# Altium PCB PCB1.PcbDoc
Units mil, origin at the board's own origin, x right, y up, seen from the top; angles counter-clockwise.
Board outline 6000 x 4000 mil, 2 copper layers (Top Layer, Bottom Layer); 264 components, 215 nets, 952 pads, 44 vias.
Unrouted connection lines stored in the file: 660.
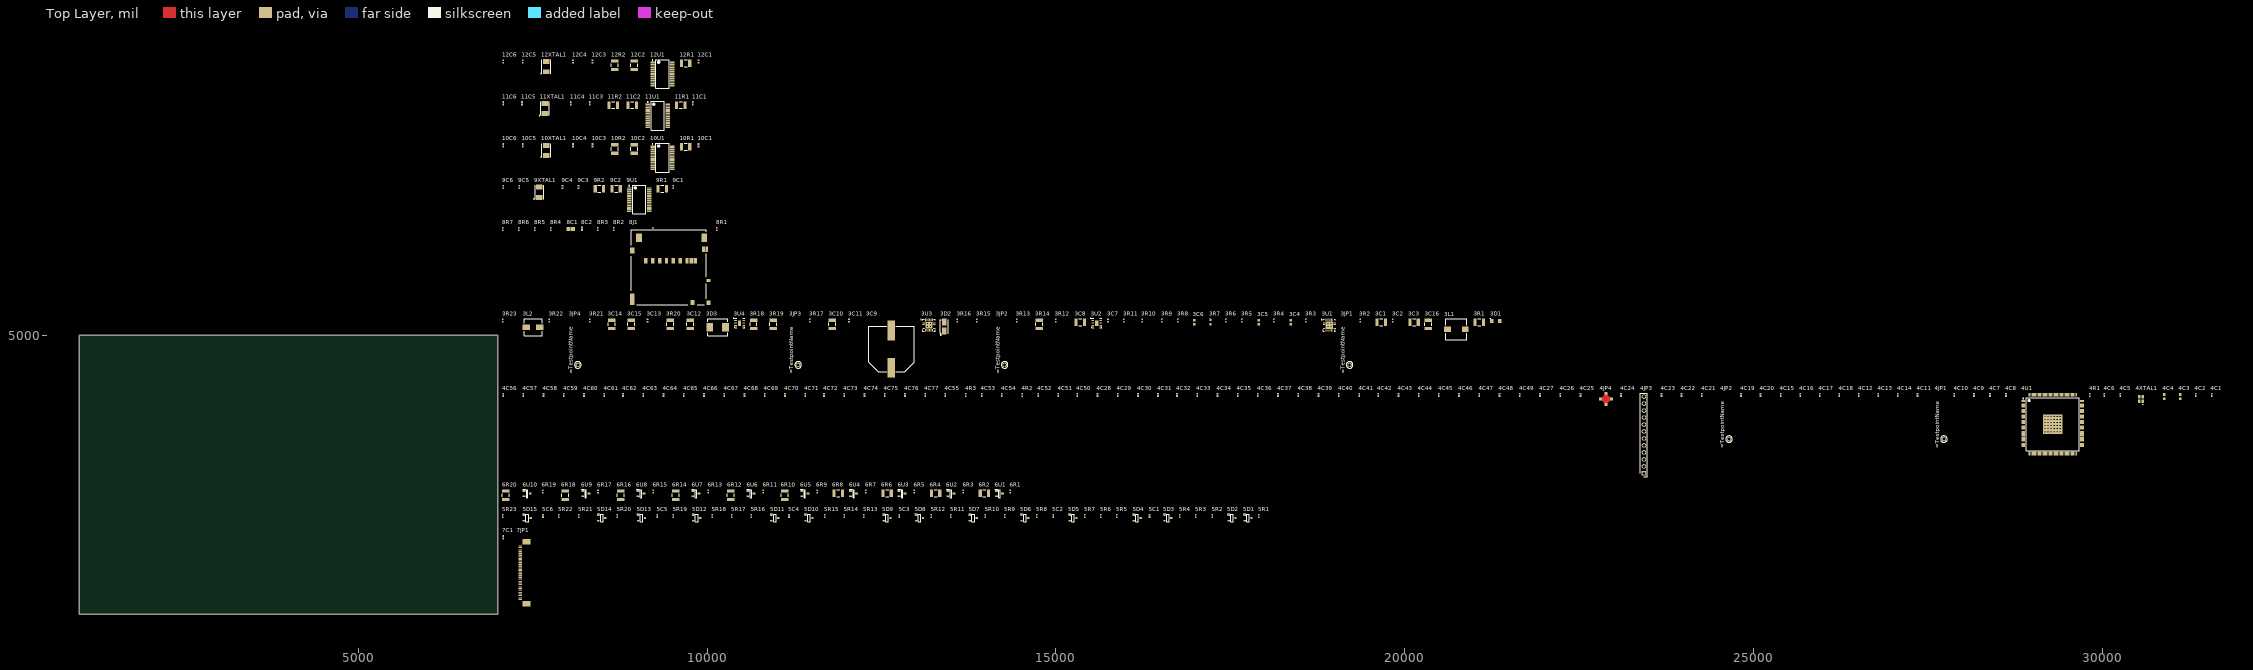
[diagram p0: Top Layer view]
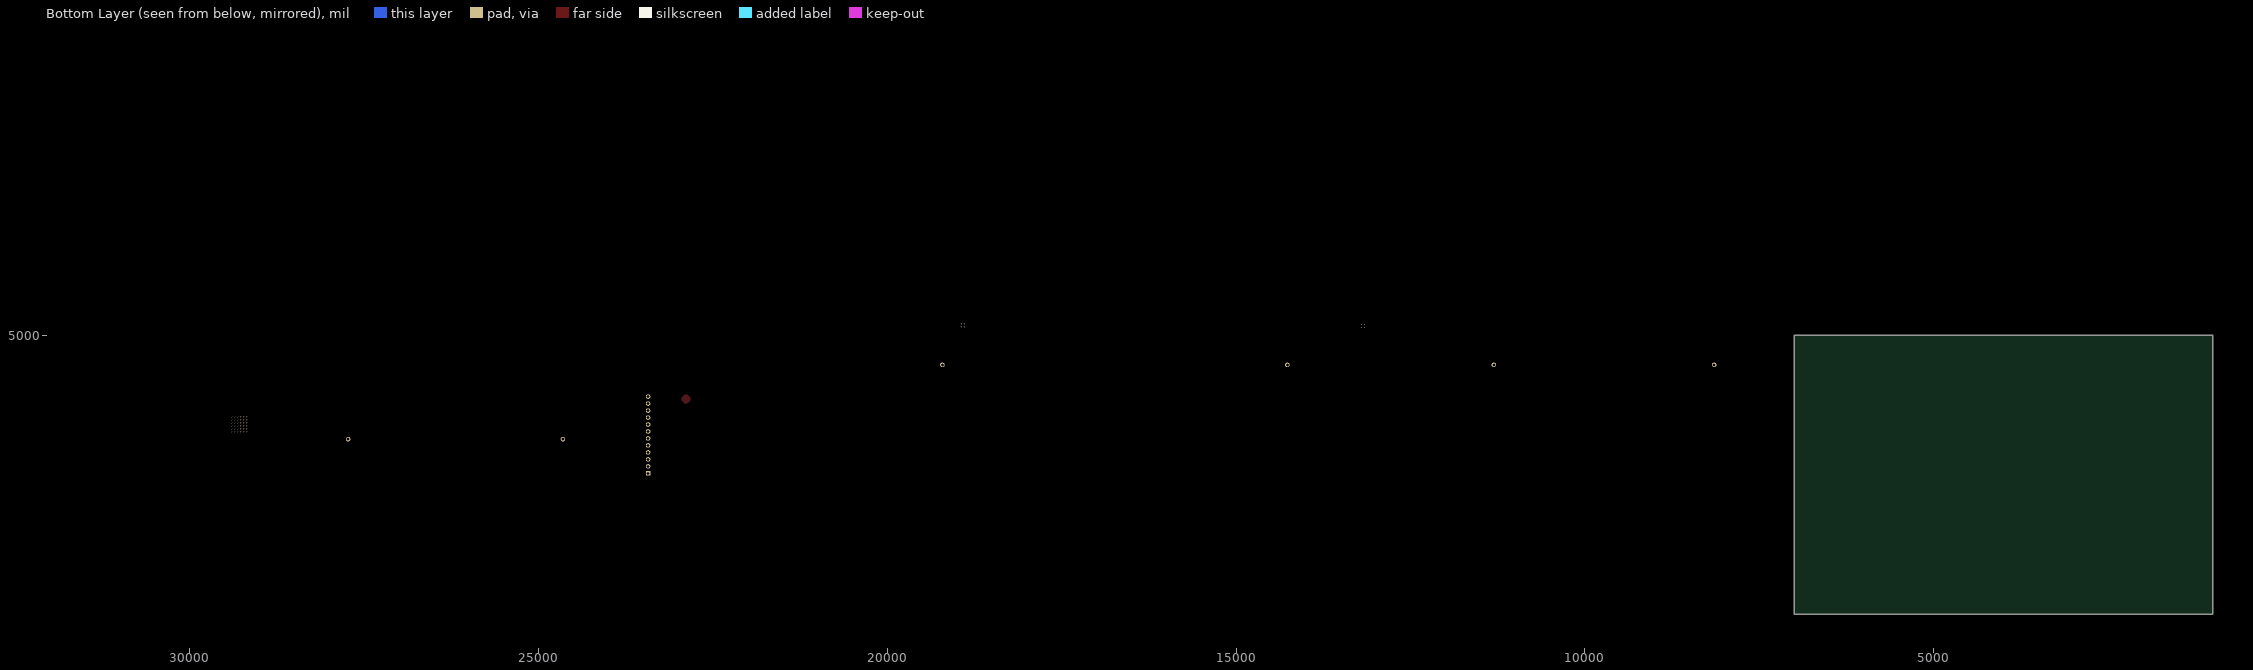
[diagram p1: Bottom Layer view, seen from below]

## Layer stack, top to bottom
Top Solder: solder mask 0.4, Solder Resist, Dk 3.5
Top Layer: signal copper 1.4
Dielectric 1: dielectric 12.6, FR-4, Dk 4.8
Bottom Layer: signal copper 1.4
Bottom Solder: solder mask 0.4, Solder Resist, Dk 3.5

## Board outline
1000,1000 7000,1000 7000,5000 1000,5000

## Design rules (kind name [scope] priority, off if disabled: settings)
Clearance [All] p1: gap=10 ignorepadtopadclearanceinfootprint=FALSE except(0: Arc-Hole Track-Hole SMDPad-Hole THPad-Hole Via-Hole Fill-Hole Poly-Hole Region-Hole Text-Hole)
PolygonConnect [All] p1: connectstyle=Relief reliefconductorwidth=10 reliefentries=4 polygonreliefangle="90 Angle" airgapwidth=10
RoomDefinition SDCARD [InComponentClass('SDCARD')] p1: confinementstyle=ConfineIn formatcopy=TRUE lockcomponents=FALSE outline 7045,5405 10290,5405 10290,6670 7045,6670
RoomDefinition POWER [InComponentClass('POWER')] p2: confinementstyle=ConfineIn formatcopy=TRUE lockcomponents=FALSE outline 7045,4345 21400,4345 21400,5355 7045,5355
RoomDefinition MICROCONTROLLER [InComponentClass('MICROCONTROLLER')] p3: confinementstyle=ConfineIn formatcopy=TRUE lockcomponents=FALSE outline 7045,2950 31715,2950 31715,4290 7045,4290
RoomDefinition LEDS [InComponentClass('LEDS')] p4: confinementstyle=ConfineIn formatcopy=TRUE lockcomponents=FALSE outline 7045,2605 14495,2605 14495,2905 7045,2905
RoomDefinition INPUTS [InComponentClass('INPUTS')] p5: confinementstyle=ConfineIn formatcopy=TRUE lockcomponents=FALSE outline 7045,2305 18060,2305 18060,2555 7045,2555
RoomDefinition DISPLAY [InComponentClass('DISPLAY')] p6: confinementstyle=ConfineIn formatcopy=TRUE lockcomponents=FALSE outline 7045,1060 7560,1060 7560,2250 7045,2250
RoomDefinition DashLogger [InComponentClass('DashLogger')] p7: confinementstyle=ConfineIn formatcopy=TRUE lockcomponents=FALSE outline 0,0 2000,0 2000,1000 0,1000
RoomDefinition CAN4 [InComponentClass('CAN4')] p8: confinementstyle=ConfineIn formatcopy=TRUE lockcomponents=FALSE outline 7045,8520 10070,8520 10070,9070 7045,9070
RoomDefinition CAN3 [InComponentClass('CAN3')] p9: confinementstyle=ConfineIn formatcopy=TRUE lockcomponents=FALSE outline 7045,7920 9980,7920 9980,8470 7045,8470
RoomDefinition CAN2 [InComponentClass('CAN2')] p10: confinementstyle=ConfineIn formatcopy=TRUE lockcomponents=FALSE outline 7045,7320 10070,7320 10070,7870 7045,7870
RoomDefinition CAN1 [InComponentClass('CAN1')] p11: confinementstyle=ConfineIn formatcopy=TRUE lockcomponents=FALSE outline 7045,6720 9660,6720 9660,7270 7045,7270
RoutingVias [All] p1: holewidth=28 width=50 viastyle="Through Hole" minholewidth=28 minwidth=50 maxholewidth=28 maxwidth=50
SolderMaskExpansion [All] p1: expansion=4 istentingtop=FALSE
Width [All] p1: maxlimit=10 minlimit=10 preferedwidth=10
30 further rules are at their usual default settings.

## Classes and differential pairs
channel class CANInterface: CAN1 CAN2 CAN3 CAN4
component class SDCARD: 8C1 8C2 8J1 8R1 8R2 8R3 8R4 8R5 8R6 8R7
component class POWER: 3C1 3C2 3C3 3C4 3C5 3C6 3C7 3C8 3C9 3C10 3C11 3C12 3C13 3C14 3C15 3C16 3D1 3D2 3D3 3JP1 3JP2 3JP3 3JP4 3L1 3L2 3R1 3R2 3R3 3R4 3R5 3R6 3R7 3R8 3R9 3R10 3R11 3R12 3R13 3R14 3R15 3R16 3R17 3R18 3R19 3R20 3R21 3R22 3R23 3U1 3U2 3U3 3U4
component class MICROCONTROLLER: 4C1 4C2 4C3 4C4 4C5 4C6 4C7 4C8 4C9 4C10 4C11 4C12 4C13 4C14 4C15 4C16 4C17 4C18 4C19 4C20 4C21 4C22 4C23 4C24 4C25 4C26 4C27 4C28 4C29 4C30 4C31 4C32 4C33 4C34 4C35 4C36 4C37 4C38 4C39 4C40 4C41 4C42 4C43 4C44 4C45 4C46 4C47 4C48 4C49 4C50 4C51 4C52 4C53 4C54 4C55 4C56 4C57 4C58 4C59 4C60 4C61 4C62 4C63 4C64 4C65 4C66 4C67 4C68 4C69 4C70 4C71 4C72 4C73 4C74 4C75 4C76 4C77 4JP1 4JP2 4JP3 4JP4 4R1 4R2 4R3 4U1 4XTAL1
component class LEDS: 6R1 6R2 6R3 6R4 6R5 6R6 6R7 6R8 6R9 6R10 6R11 6R12 6R13 6R14 6R15 6R16 6R17 6R18 6R19 6R20 6U1 6U2 6U3 6U4 6U5 6U6 6U7 6U8 6U9 6U10
component class INPUTS: 5C1 5C2 5C3 5C4 5C5 5C6 5D1 5D2 5D3 5D4 5D5 5D6 5D7 5D8 5D9 5D10 5D11 5D12 5D13 5D14 5D15 5R1 5R2 5R3 5R4 5R5 5R6 5R7 5R8 5R9 5R10 5R11 5R12 5R13 5R14 5R15 5R16 5R17 5R18 5R19 5R20 5R21 5R22 5R23
component class DISPLAY: 7C1 7JP1
component class DashLogger: 1JP1
component class CAN4: 12C1 12C2 12C3 12C4 12C5 12C6 12R1 12R2 12U1 12XTAL1
component class CAN3: 11C1 11C2 11C3 11C4 11C5 11C6 11R1 11R2 11U1 11XTAL1
component class CAN2: 10C1 10C2 10C3 10C4 10C5 10C6 10R1 10R2 10U1 10XTAL1
component class CAN1: 9C1 9C2 9C3 9C4 9C5 9C6 9R1 9R2 9U1 9XTAL1

## Components (designator, comment, footprint, x,y, rotation, side; value= is the part's Value field where it differs from the comment)
3C1 "4.7uF" C_1210 19665,5185 r0 top (schematic designator C7)
3C2 "100nF" C_0402 19830,5210 r90 top (schematic designator C8)
3C3 "2.2uF" C_1210 20135,5185 r0 top (schematic designator C9)
3C4 "1uF" C_0603 18365,5185 r90 top (schematic designator C10)
3C5 "Generic" C_0603 17905,5185 r90 top (schematic designator C11)
3C6 "Generic" C_0603 16985,5185 r90 top (schematic designator C12)
3C7 "22nF" C_0402 15745,5210 r90 top (schematic designator C13)
3C8 "22uF" C_1210 15350,5185 r0 top (schematic designator C14)
3C9 "220uF" MAL225099909E3 12640,4800 r90 top (schematic designator C15)
3C10 "4.7uF" C_1210 11795,5155 r90 top (schematic designator C16)
3C11 "100nF" C_0402 12035,5210 r90 top (schematic designator C17)
3C12 "22uF" C_1210 9760,5155 r90 top (schematic designator C18)
3C13 "100nF" C_0402 9145,5210 r90 top (schematic designator C19)
3C14 "22uF" C_1210 8630,5155 r90 top (schematic designator C20)
3C15 "22uF" C_1210 8910,5155 r90 top (schematic designator C21)
3C16 "2.2uF" C_1210 20340,5155 r90 top (schematic designator C108)
3D1 "S215FA" S215FA 21305,5205 r0 top (schematic designator D1)
3D2 "SSA24" SSA24 13400,5125 r90 top (schematic designator D2)
3D3 "16V" SM30T19CAY 10150,5115 r0 top (schematic designator D3)
3JP1 "Testpoint" "Manual Testpoint" 19210,4575 r90 top (schematic designator JP1)
3JP2 "Testpoint" "Manual Testpoint" 14265,4575 r90 top (schematic designator JP2)
3JP3 "Testpoint" "Manual Testpoint" 11305,4575 r90 top (schematic designator JP3)
3JP4 "Testpoint" "Manual Testpoint" 8145,4575 r90 top (schematic designator JP4)
3L1 "98.5uH" DRA74-101-R 20740,5085 r0 top (schematic designator L1)
3L2 "3.3uH" CLF6045NIT-3R3N-D 7505,5115 r0 top (schematic designator L2)
3R1 "0R" R_1210 21070,5185 r0 top (schematic designator R3)
3R2 "226k" R_0402 19360,5210 r90 top (schematic designator R4)
3R3 "10k" R_0402 18585,5210 r90 top (schematic designator R5)
3R4 "19k6" R_0402 18125,5210 r90 top (schematic designator R6)
3R5 "19k6" R_0402 17665,5210 r90 top (schematic designator R7)
3R6 "19k6" R_0402 17435,5210 r90 top (schematic designator R8)
3R7 "Generic" R_0603 17215,5190 r90 top (schematic designator R9)
3R8 "20k5" R_0402 16745,5210 r90 top (schematic designator R10)
3R9 "39k2" R_0402 16515,5210 r90 top (schematic designator R11)
3R10 "9k16" R_0402 16235,5210 r90 top (schematic designator R12)
3R11 "9k76" R_0402 15975,5210 r90 top (schematic designator R13)
3R12 "13k" R_0402 14995,5210 r90 top (schematic designator R14)
3R13 "100k" R_0402 14435,5210 r90 top (schematic designator R15)
3R14 "0R" R_1210 14760,5155 r90 top (schematic designator R16)
3R15 "100k" R_0402 13865,5210 r90 top (schematic designator R17)
3R16 "5k1" R_0402 13585,5210 r90 top (schematic designator R18)
3R17 "1k" R_0402 11470,5210 r90 top (schematic designator R19)
3R18 "0R" R_1210 10665,5155 r90 top (schematic designator R20)
3R19 "0R" R_1210 10945,5155 r90 top (schematic designator R21)
3R20 "0R" R_1210 9470,5155 r90 top (schematic designator R22)
3R21 "33k" R_0402 8315,5210 r90 top (schematic designator R23)
3R22 "100k" R_0402 7735,5210 r90 top (schematic designator R24)
3R23 "5k1" R_0402 7070,5210 r90 top (schematic designator R25)
3U1 "ALT80600KESJSR" ALT80600KESJSR 18920,5145 r0 top (schematic designator U2)
3U2 "NCV5661MN33T2G" NCV5661MN33T2G 15585,5175 r0 top (schematic designator U3)
3U3 "BD8P250MUF-CE2" BD8P250MUF-CE2 13180,5145 r0 top (schematic designator U4)
3U4 "NCV5661MN18T2G" NCV5661MN18T2G 10465,5175 r0 top (schematic designator U5)
4C1 "10nF" C_0402 31570,4145 r90 top (schematic designator C22)
4C2 "10nF" C_0402 31340,4145 r90 top (schematic designator C23)
4C3 "10pF" C_0603 31120,4120 r90 top (schematic designator C24)
4C4 "10pF" C_0603 30890,4120 r90 top (schematic designator C25)
4C5 "100nF" C_0402 30260,4145 r90 top (schematic designator C26)
4C6 "100nF" C_0402 30030,4145 r90 top (schematic designator C27)
4C7 "100nF" C_0402 28390,4145 r90 top (schematic designator C28)
4C8 "10nF" C_0402 28620,4145 r90 top (schematic designator C29)
4C9 "100nF" C_0402 28160,4145 r90 top (schematic designator C30)
4C10 "10nF" C_0402 27880,4145 r90 top (schematic designator C31)
4C11 "100nF" C_0402 27350,4145 r90 top (schematic designator C32)
4C12 "10nF" C_0402 26510,4145 r90 top (schematic designator C33)
4C13 "10nF" C_0402 26790,4145 r90 top (schematic designator C34)
4C14 "100nF" C_0402 27070,4145 r90 top (schematic designator C35)
4C15 "100nF" C_0402 25390,4145 r90 top (schematic designator C36)
4C16 "10nF" C_0402 25670,4145 r90 top (schematic designator C37)
4C17 "100nF" C_0402 25950,4145 r90 top (schematic designator C38)
4C18 "10nF" C_0402 26230,4145 r90 top (schematic designator C39)
4C19 "10nF" C_0402 24820,4145 r90 top (schematic designator C40)
4C20 "100nF" C_0402 25100,4145 r90 top (schematic designator C41)
4C21 "10nF" C_0402 24260,4145 r90 top (schematic designator C42)
4C22 "100nF" C_0402 23970,4145 r90 top (schematic designator C43)
4C23 "10nF" C_0402 23680,4145 r90 top (schematic designator C44)
4C24 "100nF" C_0402 23100,4145 r90 top (schematic designator C45)
4C25 "10nF" C_0402 22520,4145 r90 top (schematic designator C46)
4C26 "10nF" C_0402 22230,4145 r90 top (schematic designator C47)
4C27 "10nF" C_0402 21940,4145 r90 top (schematic designator C48)
4C28 "10nF" C_0402 15595,4145 r90 top (schematic designator C49)
4C29 "100nF" C_0402 15885,4145 r90 top (schematic designator C50)
4C30 "10nF" C_0402 16175,4145 r90 top (schematic designator C51)
4C31 "100nF" C_0402 16465,4145 r90 top (schematic designator C52)
4C32 "10nF" C_0402 16735,4145 r90 top (schematic designator C53)
4C33 "100nF" C_0402 17025,4145 r90 top (schematic designator C54)
4C34 "10nF" C_0402 17315,4145 r90 top (schematic designator C55)
4C35 "100nF" C_0402 17605,4145 r90 top (schematic designator C56)
4C36 "10nF" C_0402 17895,4145 r90 top (schematic designator C57)
4C37 "100nF" C_0402 18185,4145 r90 top (schematic designator C58)
4C38 "10nF" C_0402 18475,4145 r90 top (schematic designator C59)
4C39 "100nF" C_0402 18765,4145 r90 top (schematic designator C60)
4C40 "10nF" C_0402 19055,4145 r90 top (schematic designator C61)
4C41 "100nF" C_0402 19350,4145 r90 top (schematic designator C62)
4C42 "10nF" C_0402 19620,4145 r90 top (schematic designator C63)
4C43 "100nF" C_0402 19910,4145 r90 top (schematic designator C64)
4C44 "10nF" C_0402 20200,4145 r90 top (schematic designator C65)
4C45 "100nF" C_0402 20490,4145 r90 top (schematic designator C66)
4C46 "10nF" C_0402 20780,4145 r90 top (schematic designator C67)
4C47 "100nF" C_0402 21070,4145 r90 top (schematic designator C68)
4C48 "10nF" C_0402 21360,4145 r90 top (schematic designator C69)
4C49 "100nF" C_0402 21650,4145 r90 top (schematic designator C70)
4C50 "100nF" C_0402 15305,4145 r90 top (schematic designator C71)
4C51 "100nF" C_0402 15035,4145 r90 top (schematic designator C72)
4C52 "100nF" C_0402 14745,4145 r90 top (schematic designator C73)
4C53 "10nF" C_0402 13935,4145 r90 top (schematic designator C74)
4C54 "100nF" C_0402 14225,4145 r90 top (schematic designator C75)
4C55 "100nF" C_0402 13415,4145 r90 top (schematic designator C76)
4C56 "10nF" C_0402 7075,4145 r90 top (schematic designator C77)
4C57 "100nF" C_0402 7365,4145 r90 top (schematic designator C78)
4C58 "10nF" C_0402 7655,4145 r90 top (schematic designator C79)
4C59 "100nF" C_0402 7945,4145 r90 top (schematic designator C80)
4C60 "10nF" C_0402 8235,4145 r90 top (schematic designator C81)
4C61 "100nF" C_0402 8525,4145 r90 top (schematic designator C82)
4C62 "10nF" C_0402 8795,4145 r90 top (schematic designator C83)
4C63 "100nF" C_0402 9085,4145 r90 top (schematic designator C84)
4C64 "10nF" C_0402 9375,4145 r90 top (schematic designator C85)
4C65 "100nF" C_0402 9665,4145 r90 top (schematic designator C86)
4C66 "10nF" C_0402 9955,4145 r90 top (schematic designator C87)
4C67 "100nF" C_0402 10245,4145 r90 top (schematic designator C88)
4C68 "10nF" C_0402 10535,4145 r90 top (schematic designator C89)
4C69 "100nF" C_0402 10825,4145 r90 top (schematic designator C90)
4C70 "10nF" C_0402 11115,4145 r90 top (schematic designator C91)
4C71 "100nF" C_0402 11405,4145 r90 top (schematic designator C92)
4C72 "10nF" C_0402 11675,4145 r90 top (schematic designator C93)
4C73 "100nF" C_0402 11965,4145 r90 top (schematic designator C94)
4C74 "10nF" C_0402 12255,4145 r90 top (schematic designator C95)
4C75 "100nF" C_0402 12545,4145 r90 top (schematic designator C96)
4C76 "10nF" C_0402 12835,4145 r90 top (schematic designator C97)
4C77 "100nF" C_0402 13125,4145 r90 top (schematic designator C98)
4JP1 "Testpoint" "Manual Testpoint" 27730,3510 r90 top (schematic designator JP5)
4JP2 "Testpoint" "Manual Testpoint" 24650,3510 r90 top (schematic designator JP6)
4JP3 "DBG Connector" HDRV12W63P0X254_1X12_3048X254X950P 23430,3020 r90 top (schematic designator JP7)
4JP4 "NETTIE" NETTIE 22885,4085 r0 top (schematic designator JP8)
4R1 "Generic" R_0402 29820,4145 r90 top (schematic designator R26)
4R2 "1k" R_0402 14515,4145 r90 top (schematic designator R27)
4R3 "10k" R_0402 13705,4145 r90 top (schematic designator R28)
4U1 "PIC32MZ2064DAH176" PIC32MZ2064DAH176T-I/2J 29290,3725 r0 top (schematic designator U6)
4XTAL1 "24MHz" ECS2401036QESTR 30555,4085 r90 top (schematic designator XTAL2)
5C1 "100nF" C_0402 16340,2410 r90 top (schematic designator C102)
5C2 "100nF" C_0402 14960,2410 r90 top (schematic designator C103)
5C3 "100nF" C_0402 12755,2410 r90 top (schematic designator C104)
5C4 "100nF" C_0402 11175,2410 r90 top (schematic designator C105)
5C5 "100nF" C_0402 9285,2410 r90 top (schematic designator C106)
5C6 "100nF" C_0402 7645,2410 r90 top (schematic designator C107)
5D1 "BAT 54-04 E6327" SOT95P240X110-3N 17755,2380 r0 top (schematic designator D4)
5D2 "BAT 54-04 E6327" SOT95P240X110-3N 17525,2380 r0 top (schematic designator D5)
5D3 "BAT 54-04 E6327" SOT95P240X110-3N 16605,2380 r0 top (schematic designator D6)
5D4 "BAT 54-04 E6327" SOT95P240X110-3N 16165,2380 r0 top (schematic designator D7)
5D5 "BAT 54-04 E6327" SOT95P240X110-3N 15245,2380 r0 top (schematic designator D8)
5D6 "BAT 54-04 E6327" SOT95P240X110-3N 14555,2380 r0 top (schematic designator D9)
5D7 "BAT 54-04 E6327" SOT95P240X110-3N 13815,2380 r0 top (schematic designator D10)
5D8 "BAT 54-04 E6327" SOT95P240X110-3N 13045,2380 r0 top (schematic designator D11)
5D9 "BAT 54-04 E6327" SOT95P240X110-3N 12580,2380 r0 top (schematic designator D12)
5D10 "BAT 54-04 E6327" SOT95P240X110-3N 11460,2380 r0 top (schematic designator D13)
5D11 "BAT 54-04 E6327" SOT95P240X110-3N 10970,2380 r0 top (schematic designator D14)
5D12 "BAT 54-04 E6327" SOT95P240X110-3N 9850,2380 r0 top (schematic designator D15)
5D13 "BAT 54-04 E6327" SOT95P240X110-3N 9060,2380 r0 top (schematic designator D16)
5D14 "BAT 54-04 E6327" SOT95P240X110-3N 8490,2380 r0 top (schematic designator D17)
5D15 "BAT 54-04 E6327" SOT95P240X110-3N 7420,2380 r0 top (schematic designator D18)
5R1 "20k5" R_0402 17910,2410 r90 top (schematic designator R56)
5R2 "2k" R_0402 17240,2410 r90 top (schematic designator R57)
5R3 "5k1" R_0402 17005,2410 r90 top (schematic designator R58)
5R4 "20k5" R_0402 16775,2410 r90 top (schematic designator R59)
5R5 "5k1" R_0402 15875,2410 r90 top (schematic designator R60)
5R6 "100k" R_0402 15645,2410 r90 top (schematic designator R61)
5R7 "20k5" R_0402 15415,2410 r90 top (schematic designator R62)
5R8 "5k1" R_0402 14725,2410 r90 top (schematic designator R63)
5R9 "20k5" R_0402 14265,2410 r90 top (schematic designator R64)
5R10 "100k" R_0402 13985,2410 r90 top (schematic designator R65)
5R11 "5k1" R_0402 13495,2410 r90 top (schematic designator R66)
5R12 "20k5" R_0402 13215,2410 r90 top (schematic designator R67)
5R13 "100k" R_0402 12245,2410 r90 top (schematic designator R68)
5R14 "5k1" R_0402 11965,2410 r90 top (schematic designator R69)
5R15 "20k5" R_0402 11685,2410 r90 top (schematic designator R70)
5R16 "5k1" R_0402 10635,2410 r90 top (schematic designator R71)
5R17 "100k" R_0402 10355,2410 r90 top (schematic designator R72)
5R18 "20k5" R_0402 10075,2410 r90 top (schematic designator R73)
5R19 "5k1" R_0402 9515,2410 r90 top (schematic designator R74)
5R20 "20k5" R_0402 8710,2410 r90 top (schematic designator R75)
5R21 "100k" R_0402 8160,2410 r90 top (schematic designator R76)
5R22 "5k1" R_0402 7870,2410 r90 top (schematic designator R77)
5R23 "100k" R_0402 7070,2410 r90 top (schematic designator R78)
6R1 "9k16" R_0402 14345,2760 r90 top (schematic designator R36)
6R2 "100R" R_1210 13975,2735 r0 top (schematic designator R37)
6R3 "9k16" R_0402 13670,2760 r90 top (schematic designator R38)
6R4 "100R" R_1210 13275,2735 r0 top (schematic designator R39)
6R5 "9k16" R_0402 12970,2760 r90 top (schematic designator R40)
6R6 "100R" R_1210 12580,2735 r0 top (schematic designator R41)
6R7 "9k16" R_0402 12275,2760 r90 top (schematic designator R42)
6R8 "100R" R_1210 11880,2735 r0 top (schematic designator R43)
6R9 "9k16" R_0402 11575,2760 r90 top (schematic designator R44)
6R10 "100R" R_1210 11110,2705 r90 top (schematic designator R45)
6R11 "9k16" R_0402 10805,2760 r90 top (schematic designator R46)
6R12 "100R" R_1210 10340,2705 r90 top (schematic designator R47)
6R13 "9k16" R_0402 10015,2760 r90 top (schematic designator R48)
6R14 "100R" R_1210 9550,2705 r90 top (schematic designator R49)
6R15 "9k16" R_0402 9225,2760 r90 top (schematic designator R50)
6R16 "100R" R_1210 8760,2705 r90 top (schematic designator R51)
6R17 "9k16" R_0402 8435,2760 r90 top (schematic designator R52)
6R18 "100R" R_1210 7965,2705 r90 top (schematic designator R53)
6R19 "9k16" R_0402 7640,2760 r90 top (schematic designator R54)
6R20 "100R" R_1210 7115,2705 r90 top (schematic designator R55)
6U1 "BC847B" SOT95P230X110-3N 14190,2730 r0 top (schematic designator U7)
6U2 "BC847B" SOT95P230X110-3N 13495,2730 r0 top (schematic designator U8)
6U3 "BC847B" SOT95P230X110-3N 12795,2730 r0 top (schematic designator U9)
6U4 "BC847B" SOT95P230X110-3N 12100,2730 r0 top (schematic designator U10)
6U5 "BC847B" SOT95P230X110-3N 11400,2730 r0 top (schematic designator U11)
6U6 "BC847B" SOT95P230X110-3N 10630,2730 r0 top (schematic designator U12)
6U7 "BC847B" SOT95P230X110-3N 9840,2730 r0 top (schematic designator U13)
6U8 "BC847B" SOT95P230X110-3N 9050,2730 r0 top (schematic designator U14)
6U9 "BC847B" SOT95P230X110-3N 8260,2730 r0 top (schematic designator U15)
6U10 "BC847B" SOT95P230X110-3N 7420,2730 r0 top (schematic designator U16)
7C1 "100nF" C_0402 7075,2105 r90 top (schematic designator C99)
7JP1 "EA WF050-40ST" "EA WF050-40ST" 7365,1595 r90 top (schematic designator JP9)
8C1 "10uF" C_0805 8045,6520 r0 top (schematic designator C100)
8C2 "100nF" C_0402 8205,6525 r90 top (schematic designator C101)
8J1 "5035000991" 5035000991 9220,6070 r0 top (schematic designator J1)
8R1 "10k" R_0402 10140,6525 r90 top (schematic designator R29)
8R2 "10k" R_0402 8660,6525 r90 top (schematic designator R30)
8R3 "10k" R_0402 8430,6525 r90 top (schematic designator R31)
8R4 "10k" R_0402 7760,6525 r90 top (schematic designator R32)
8R5 "10k" R_0402 7530,6525 r90 top (schematic designator R33)
8R6 "10k" R_0402 7300,6525 r90 top (schematic designator R34)
8R7 "10k" R_0402 7070,6525 r90 top (schematic designator R35)
9C1 "100nF" C_0402 9515,7125 r90 top (schematic designator C1)
9C2 "4.7uF" C_1210 8695,7100 r0 top (schematic designator C2)
9C3 "100nF" C_0402 8155,7125 r90 top (schematic designator C3)
9C4 "15pF" C_0402 7925,7125 r90 top (schematic designator C4)
9C5 "15pF" C_0402 7305,7125 r90 top (schematic designator C5)
9C6 "100nF" C_0402 7075,7125 r90 top (schematic designator C6)
9R1 "62R" R_1210 9355,7100 r0 top (schematic designator R1)
9R2 "62R" R_1210 8455,7100 r0 top (schematic designator R2)
9U1 "MCP25625" MCP25625-E/SS 9025,6945 r0 top (schematic designator U1)
9XTAL1 "20Mhz" ABM3AIG-20.000MHZ-8-K1Z-T 7595,7050 r90 top (schematic designator XTAL1)
10C1 "100nF" C_0402 9875,7725 r90 top (schematic designator C1)
10C2 "4.7uF" C_1210 8955,7670 r90 top (schematic designator C2)
10C3 "100nF" C_0402 8355,7725 r90 top (schematic designator C3)
10C4 "15pF" C_0402 8075,7725 r90 top (schematic designator C4)
10C5 "15pF" C_0402 7355,7725 r90 top (schematic designator C5)
10C6 "100nF" C_0402 7075,7725 r90 top (schematic designator C6)
10R1 "62R" R_1210 9690,7700 r0 top (schematic designator R1)
10R2 "62R" R_1210 8675,7670 r90 top (schematic designator R2)
10U1 "MCP25625" MCP25625-E/SS 9360,7545 r0 top (schematic designator U1)
10XTAL1 "20Mhz" ABM3AIG-20.000MHZ-8-K1Z-T 7695,7650 r90 top (schematic designator XTAL1)
11C1 "100nF" C_0402 9795,8325 r90 top (schematic designator C1)
11C2 "4.7uF" C_1210 8925,8300 r0 top (schematic designator C2)
11C3 "100nF" C_0402 8315,8325 r90 top (schematic designator C3)
11C4 "15pF" C_0402 8045,8325 r90 top (schematic designator C4)
11C5 "15pF" C_0402 7345,8325 r90 top (schematic designator C5)
11C6 "100nF" C_0402 7075,8325 r90 top (schematic designator C6)
11R1 "62R" R_1210 9620,8300 r0 top (schematic designator R1)
11R2 "62R" R_1210 8655,8300 r0 top (schematic designator R2)
11U1 "MCP25625" MCP25625-E/SS 9290,8145 r0 top (schematic designator U1)
11XTAL1 "20Mhz" ABM3AIG-20.000MHZ-8-K1Z-T 7675,8250 r90 top (schematic designator XTAL1)
12C1 "100nF" C_0402 9875,8925 r90 top (schematic designator C1)
12C2 "4.7uF" C_1210 8955,8870 r90 top (schematic designator C2)
12C3 "100nF" C_0402 8355,8925 r90 top (schematic designator C3)
12C4 "15pF" C_0402 8075,8925 r90 top (schematic designator C4)
12C5 "15pF" C_0402 7355,8925 r90 top (schematic designator C5)
12C6 "100nF" C_0402 7075,8925 r90 top (schematic designator C6)
12R1 "62R" R_1210 9690,8900 r0 top (schematic designator R1)
12R2 "62R" R_1210 8675,8870 r90 top (schematic designator R2)
12U1 "MCP25625" MCP25625-E/SS 9360,8745 r0 top (schematic designator U1)
12XTAL1 "20Mhz" ABM3AIG-20.000MHZ-8-K1Z-T 7695,8850 r90 top (schematic designator XTAL1)

## Footprints (in the part's own frame and the unit in brackets; to place one, negate y for a bottom-side part, rotate by r counter-clockwise, add the part's x,y. Pads: shape width x height; smd on the part's side, far side on the other; paste and mask are expansions set on the pad)
5035000991 [mm]
  rect 1.2x1.95 smd: 1(0,0) 2(2.5,0) 3(5,0) 4(7.5,0) 5(10,0) 6(12.5,0) 7(14,0) 8(15.5,0) 9(-2.5,0)
  rect 2.1x3.2 smd: 10(-5.025,8.305) 11(18.775,8.305)
  rect 1.55x2.2 smd: 12(-7.43,3.625)
  rect 1x2 smd: 13(18.495,4.165) 14(19.695,4.165)
  rect 1.5x1.1 smd: 15(20.345,-7.205)
  rect 1.55x4.17 smd: 16(-7.43,-14.11)
  rect 1.6x1.87 smd: 17(14.475,-15.26)
  rect 1.5x1.65 smd: 18(20.345,-15.37)
  silkscreen extent -7.86,-16.14 19.55,11.95, body extent -7.85,-15.84 20.75,11.96, height 3
ABM3AIG-20.000MHZ-8-K1Z-T [mm] "DFN, 2-Leads, Body 3,20x5,00mm, Pitch 3,70mm, IPC Medium Density"
  rect 1.8x2.4 smd: 1(-1.85,0) 2(1.85,0)
  silkscreen extent -2.55,-1.6 2.5,2.05, body extent -2.5,-1.6 2.5,1.6, height 1.55
ALT80600KESJSR [mm]
  oval 0.8x0.25 smd: 1(-1.95,1.25) 2(-1.95,0.75) 3(-1.95,0.25) 4(-1.95,-0.25) 5(-1.95,-0.75) 6(-1.95,-1.25) 13(1.95,-1.25) 14(1.95,-0.75) 15(1.95,-0.25) 16(1.95,0.25) 17(1.95,0.75) 18(1.95,1.25)
  oval 0.25x0.8 smd: 7(-1.25,-1.95) 8(-0.75,-1.95) 9(-0.25,-1.95) 10(0.25,-1.95) 11(0.75,-1.95) 12(1.25,-1.95) 19(1.25,1.95) 20(0.75,1.95) 21(0.25,1.95) 22(-0.25,1.95) 23(-0.75,1.95) 24(-1.25,1.95)
  rect 2.73x2.73 smd: 25(0,0)
  silkscreen extent -2.97,-2.2 2.2,2.2, body extent -2.1,-2.1 2.1,2.1, height 0.8
BD8P250MUF-CE2 [mm]
  oval 0.95x0.25 smd: 1(-1.875,1.25) 2(-1.875,0.75) 3(-1.875,0.25) 4(-1.875,-0.25) 5(-1.875,-0.75) 6(-1.875,-1.25) 13(1.875,-1.25) 14(1.875,-0.75) 15(1.875,-0.25) 16(1.875,0.25) 17(1.875,0.75) 18(1.875,1.25)
  oval 0.25x0.95 smd: 7(-1.25,-1.875) 8(-0.75,-1.875) 9(-0.25,-1.875) 10(0.25,-1.875) 11(0.75,-1.875) 12(1.25,-1.875) 19(1.25,1.875) 20(0.75,1.875) 21(0.25,1.875) 22(-0.25,1.875) 23(-0.75,1.875) 24(-1.25,1.875)
  rect 2.4x2.4 smd: 25(0,0)
  silkscreen extent -2.97,-2.2 2.2,2.2, body extent -2.15,-2.15 2.15,2.15, height 1
C_0402 [mm] "Chip Capacitor, 2-Leads, Body 1,00x0,50mm, IPC Medium Density"
  rect 0.64x0.64 smd: 1(-0.45,0) 2(0.45,0)
  body extent -0.5,-0.25 0.5,0.25, height 0.5
C_0603 [mm]
  rect 0.95x0.95 smd: 1(-0.75,0) 2(0.75,0)
  body extent -0.8,-0.4 0.8,0.4, height 0.8
C_0805 [mm]
  rect 1.35x1.45 smd: 1(-0.825,0) 2(0.825,0)
  body extent -1.15,-0.72 1.15,0.72, height 1.45
C_1210 [mm]
  rect 1.15x2.7 smd: 1(-1.525,0) 2(1.525,0)
  silkscreen extent -0.55,-1.25 0.55,1.25, body extent -1.75,-1.35 1.75,1.35, height 2.7
CLF6045NIT-3R3N-D [mm] "Precision Wire Wound Inductor, 2-Leads, Body 6,30x6,00mm, IPC Medium Density"
  rect 2.8x2.1 smd: 1(-2.45,0) 2(2.45,0)
  silkscreen extent -3.25,-3.1 3.25,3.1, body extent -3.25,-3 3.25,3, height 4.9
DRA74-101-R [mm]
  rect 2.45x2.1 smd: 1(-3.225,0) 2(3.225,0)
  silkscreen extent -3.8,-3.8 3.8,3.8, body extent -3.9,-3.8 3.9,3.8, height 4.45
"EA WF050-40ST" [mm] "40 Pin FPC Connector"
  rect 0.3x1.25 smd paste-2539.97 mask+0.102: 1(-9.75,1.163) 2(-9.25,1.163) 3(-8.75,1.163) 4(-8.25,1.163) 5(-7.75,1.163) 6(-7.25,1.163) 7(-6.75,1.163) 8(-6.25,1.163) 9(-5.75,1.163) 10(-5.25,1.163) 11(-4.75,1.163) 12(-4.25,1.163) 13(-3.75,1.163) 14(-3.25,1.163) 15(-2.75,1.163) 16(-2.25,1.163) 17(-1.75,1.163) 18(-1.25,1.163) 19(-0.75,1.163) 20(-0.25,1.163) 21(0.25,1.163) 22(0.75,1.163) 23(1.25,1.163) 24(1.75,1.163) 25(2.25,1.163) 26(2.75,1.163) 27(3.25,1.163) 28(3.75,1.163) 29(4.25,1.163) 30(4.75,1.163) 31(5.25,1.163) 32(5.75,1.163) 33(6.25,1.163) 34(6.75,1.163) 35(7.25,1.163) 36(7.75,1.163) 37(8.25,1.163) 38(8.75,1.163) 39(9.25,1.163) 40(9.75,1.163)
  rect 2x3 smd paste-2539.97 mask+0.102: 41(-11.3,-1.162) 41(11.3,-1.162)
  body extent -12.77,-4.02 12.73,0.48, height 2
ECS2401036QESTR [mm]
  rect 1.2x1 smd: 1(-0.85,-0.65) 2(0.85,0.65) 3(-0.85,0.65) 3(0.85,-0.65)
  silkscreen extent -2.05,-0.7 -1.95,-0.6, body extent -1.35,-1.05 1.35,1.05, height 0.7
HDRV12W63P0X254_1X12_3048X254X950P [mm]
  rect 1.65x1.65 hole 1.1: 1(0,0)
  round 1.65 hole 1.1: 2(2.54,0) 3(5.08,0) 4(7.62,0) 5(10.16,0) 6(12.7,0) 7(15.24,0) 8(17.78,0) 9(20.32,0) 10(22.86,0) 11(25.4,0) 12(27.94,0)
  silkscreen extent -1.27,-1.27 29.21,1.27, body extent -1.46,-2.45 29.02,1.2, height 9.5
MAL225099909E3 [mm]
  rect 7.15x2.65 smd: 1(-6.8,0) 2(6.8,0)
  silkscreen extent -8.3,-8.3 8.3,8.3, body extent -9.3,-8.3 9.3,8.3, height 17.5
"Manual Testpoint" [mm]
  round 1.65 hole 1.1: 1(0,0)
  silkscreen extent -1.2,-1.2 1.2,1.2
MCP25625-E/SS [mm] "CAN Transciever and Controller SPI"
  rect 1.65x0.5 smd: 1(-3.625,4.225) 2(-3.625,3.575) 3(-3.625,2.925) 4(-3.625,2.275) 5(-3.625,1.625) 6(-3.625,0.975) 7(-3.625,0.325) 8(-3.625,-0.325) 9(-3.625,-0.975) 10(-3.625,-1.625) 11(-3.625,-2.275) 12(-3.625,-2.925) 13(-3.625,-3.575) 14(-3.625,-4.225) 15(3.625,-4.225) 16(3.625,-3.575) 17(3.625,-2.925) 18(3.625,-2.275) 19(3.625,-1.625) 20(3.625,-0.975) 21(3.625,-0.325) 22(3.625,0.325) 23(3.625,0.975) 24(3.625,1.625) 25(3.625,2.275) 26(3.625,2.925) 27(3.625,3.575) 28(3.625,4.225)
  silkscreen extent -3.75,-5.25 2.4,5.25, body extent -2.8,-5.25 2.8,5.25, height 2
NCV5661MN18T2G [mm] "SON, 6-Leads, Body 3,00x3,30mm, Pitch 0,95mm, Thermal Pad 2,00x1,20mm, IPC Medium Density"
  rect 1x0.45 smd: 1(-1.495,0.95) 2(-1.495,0) 3(-1.495,-0.95) 4(1.495,-0.95) 5(1.495,0) 6(1.495,0.95)
  rect 1.2x2 smd: 7(0,0)
  silkscreen extent -2.3,-1.7 1.85,1.75, body extent -1.75,-1.55 1.75,1.55, height 1
NCV5661MN33T2G [mm] "SON, 6-Leads, Body 3,00x3,30mm, Pitch 0,95mm, Thermal Pad 2,00x1,20mm, IPC Medium Density"
  rect 1x0.45 smd: 1(-1.495,0.95) 2(-1.495,0) 3(-1.495,-0.95) 4(1.495,-0.95) 5(1.495,0) 6(1.495,0.95)
  rect 1.2x2 smd: 7(0,0)
  silkscreen extent -2.3,-1.7 1.85,1.75, body extent -1.75,-1.55 1.75,1.55, height 1
NETTIE [mm]
  rect 1x1 smd paste-2539.97 mask+0.102: 1(0,2) 2(-2,0) 3(2,0) 4(0,-2)
  Top Layer region: 1.6,-0.4 0.4,-1.6 -0.4,-1.6 -1.6,-0.4 -1.6,0.4 -0.4,1.6 0.4,1.6 1.6,0.4
PIC32MZ2064DAH176T-I/2J [mm] "TSQFP, 176-Leads, Body 20,00x20,00mm, Pitch 0,40mm, Thermal Pad 7,10x7,10mm, IPC Medium Density"
  rect 1.4x0.3 smd: 1(-10.7,8.6) 2(-10.7,8.2) 3(-10.7,7.8) 4(-10.7,7.4) 5(-10.7,7) 6(-10.7,6.6) 7(-10.7,6.2) 8(-10.7,5.8) 9(-10.7,5.4) 10(-10.7,5) 11(-10.7,4.6) 12(-10.7,4.2) 13(-10.7,3.8) 14(-10.7,3.4) 15(-10.7,3) 16(-10.7,2.6) 17(-10.7,2.2) 18(-10.7,1.8) 19(-10.7,1.4) 20(-10.7,1) 21(-10.7,0.6) 22(-10.7,0.2) 23(-10.7,-0.2) 24(-10.7,-0.6) 25(-10.7,-1) 26(-10.7,-1.4) 27(-10.7,-1.8) 28(-10.7,-2.2) 29(-10.7,-2.6) 30(-10.7,-3) 31(-10.7,-3.4) 32(-10.7,-3.8) 33(-10.7,-4.2) 34(-10.7,-4.6) 35(-10.7,-5) 36(-10.7,-5.4) 37(-10.7,-5.8) 38(-10.7,-6.2) 39(-10.7,-6.6) 40(-10.7,-7) 41(-10.7,-7.4) 42(-10.7,-7.8) 43(-10.7,-8.2) 44(-10.7,-8.6) 89(10.7,-8.6) 90(10.7,-8.2) 91(10.7,-7.8) 92(10.7,-7.4) 93(10.7,-7) 94(10.7,-6.6) 95(10.7,-6.2) 96(10.7,-5.8) 97(10.7,-5.4) 98(10.7,-5) 99(10.7,-4.6) 100(10.7,-4.2) 101(10.7,-3.8) 102(10.7,-3.4) 103(10.7,-3) 104(10.7,-2.6) 105(10.7,-2.2) 106(10.7,-1.8) 107(10.7,-1.4) 108(10.7,-1) 109(10.7,-0.6) 110(10.7,-0.2) 111(10.7,0.2) 112(10.7,0.6) 113(10.7,1) 114(10.7,1.4) 115(10.7,1.8) 116(10.7,2.2) 117(10.7,2.6) 118(10.7,3) 119(10.7,3.4) 120(10.7,3.8) 121(10.7,4.2) 122(10.7,4.6) 123(10.7,5) 124(10.7,5.4) 125(10.7,5.8) 126(10.7,6.2) 127(10.7,6.6) 128(10.7,7) 129(10.7,7.4) 130(10.7,7.8) 131(10.7,8.2) 132(10.7,8.6)
  rect 0.3x1.4 smd: 45(-8.6,-10.7) 46(-8.2,-10.7) 47(-7.8,-10.7) 48(-7.4,-10.7) 49(-7,-10.7) 50(-6.6,-10.7) 51(-6.2,-10.7) 52(-5.8,-10.7) 53(-5.4,-10.7) 54(-5,-10.7) 55(-4.6,-10.7) 56(-4.2,-10.7) 57(-3.8,-10.7) 58(-3.4,-10.7) 59(-3,-10.7) 60(-2.6,-10.7) 61(-2.2,-10.7) 62(-1.8,-10.7) 63(-1.4,-10.7) 64(-1,-10.7) 65(-0.6,-10.7) 66(-0.2,-10.7) 67(0.2,-10.7) 68(0.6,-10.7) 69(1,-10.7) 70(1.4,-10.7) 71(1.8,-10.7) 72(2.2,-10.7) 73(2.6,-10.7) 74(3,-10.7) 75(3.4,-10.7) 76(3.8,-10.7) 77(4.2,-10.7) 78(4.6,-10.7) 79(5,-10.7) 80(5.4,-10.7) 81(5.8,-10.7) 82(6.2,-10.7) 83(6.6,-10.7) 84(7,-10.7) 85(7.4,-10.7) 86(7.8,-10.7) 87(8.2,-10.7) 88(8.6,-10.7) 133(8.6,10.7) 134(8.2,10.7) 135(7.8,10.7) 136(7.4,10.7) 137(7,10.7) 138(6.6,10.7) 139(6.2,10.7) 140(5.8,10.7) 141(5.4,10.7) 142(5,10.7) 143(4.6,10.7) 144(4.2,10.7) 145(3.8,10.7) 146(3.4,10.7) 147(3,10.7) 148(2.6,10.7) 149(2.2,10.7) 150(1.8,10.7) 151(1.4,10.7) 152(1,10.7) 153(0.6,10.7) 154(0.2,10.7) 155(-0.2,10.7) 156(-0.6,10.7) 157(-1,10.7) 158(-1.4,10.7) 159(-1.8,10.7) 160(-2.2,10.7) 161(-2.6,10.7) 162(-3,10.7) 163(-3.4,10.7) 164(-3.8,10.7) 165(-4.2,10.7) 166(-4.6,10.7) 167(-5,10.7) 168(-5.4,10.7) 169(-5.8,10.7) 170(-6.2,10.7) 171(-6.6,10.7) 172(-7,10.7) 173(-7.4,10.7) 174(-7.8,10.7) 175(-8.2,10.7) 176(-8.6,10.7)
  rect 7.1x7.1 smd: 177(0,0)
  silkscreen extent -10.82,-9.6 9.6,9.6, body extent -10,-10 10,10, height 1.6
R_0402 [mm]
  rect 0.55x0.55 smd: 1(-0.45,0) 2(0.45,0)
  body extent -0.5,-0.25 0.5,0.25, height 0.5
R_0603 [mm]
  rect 0.9x0.85 smd: 1(-0.75,0) 2(0.75,0)
  body extent -0.8,-0.4 0.8,0.4, height 0.8
R_1210 [mm]
  rect 1.15x2.7 smd: 1(-1.525,0) 2(1.525,0)
  silkscreen extent -0.55,-1.25 0.55,1.25, body extent -1.75,-1.35 1.75,1.35, height 1
S215FA [mm]
  rect 1.25x1.4 smd: 1(-1.475,0) 2(1.475,0)
  silkscreen extent -2.05,0.85 -1.95,0.95, body extent -1.8,-0.95 1.8,0.95, height 1.43
SM30T19CAY [mm]
  rect 2.4x3.15 smd: 1(-2.85,0) 2(2.85,0)
  silkscreen extent -3.6,-3.15 3.6,3.15, body extent -3.79,-3.13 3.79,3.13, height 2.65
SOT95P230X110-3N [mm]
  rect 1.05x0.6 smd: 1(-1.1,0.95) 2(-1.1,-0.95) 3(1.1,0)
  silkscreen extent -1.63,-1.45 0.23,1.5, body extent -1.15,-1.45 1.15,1.45, height 1.1
SOT95P240X110-3N [mm]
  rect 0.85x0.6 smd: 1(-1.25,0.95) 2(-1.25,-0.95) 3(1.25,0)
  silkscreen extent -1.68,-1.45 0.48,1.5, body extent -1.2,-1.45 1.2,1.45, height 1.1
SSA24 [mm]
  rect 2.55x1.55 smd: 1(-1.6,0) 2(1.6,0)
  silkscreen extent -3.17,-1.45 2.4,1.45, body extent -2.6,-1.45 2.6,1.45, height 2.7

## Part data
3C1 3C10 9C2 10C2 11C2 12C2: library part GCJ32ER71H475KA12L, "4.7uF 50V X7R"
3C2 4C5 4C6 4C7 4C9 4C11 4C14 4C15 4C17 4C20 4C22 4C24 4C29 4C31 4C33 4C35 4C37 4C39 4C41 4C43 4C45 4C47 4C49 4C50 4C51 4C52 4C54 4C57 4C59 4C61 4C63 4C65 4C67 4C69 4C71 4C73 4C75 4C77 5C1 5C2 5C3 5C4 5C5 5C6 7C1 8C2 9C1 9C3 9C6 10C1 10C3 10C6 11C1 11C3 11C6 12C1 12C3 12C6: library part C0402C104J8RACAUTO, "100nF 10V 0402 X7R"
3C3 3C16: library part GCJ32DR72A225KA01L, "2.2uF 100V X7R"
3C4: library part GCJ188R71E105KA01D, "1uF 25V X7R"
3C5 3C6: library part C_0603
3C7: library part GCM155R71H223KA55D, "22nF 50V X7R"
3C8 3C12 3C14 3C15: library part GCM32ER71A226KE12L, "22uF 10V X7R"
3C9: library part MAL225099909E3, "220uF 100V"
3C11 3C13 4C55: library part CGA2B3X7R1H104K050BE, "100nF 50V X7R"
3D1: "2A 150V 950mV"
3D2: "40V 2A 500mV"
3D3: library part SM30T19CAY, "16V 31.5V"
3JP1 3JP2 3JP3 3JP4 4JP1 4JP2: library part "Manual Testpoint"
  3JP1: TestpointName=30V
  3JP2: TestpointName=3V3
  3JP3: TestpointName=5V
  3JP4: TestpointName=1V8
  4JP1: TestpointName=PCLK
  4JP2: TestpointName=BINT
3L1: library part DRA74-101-R, "98.5uH 822mA 929mA 503mOhm"
3L2: library part CLF6045NIT-3R3N-D, "3.3uH 19mohms 3.5A"
3R1 3R14 3R18 3R19 3R20: library part RK73Z2ETTD., "0R 10A"
3R2: library part ERJ-U02F2263X, "226k 1% 100mW"
3R3 4R3 8R1 8R2 8R3 8R4 8R5 8R6 8R7: library part SFR01MZPF1002, "10k 1% 62.5mW"
3R4 3R5 3R6: library part ERJ2RKF1962X, "19k6 1% 100mW"
3R7: library part R_0603
3R8 5R1 5R4 5R7 5R9 5R12 5R15 5R18 5R20: library part ERJ2RKF2052X, "20k5 1% 100mW"
3R9: library part ERJ2RKF3922X, "39k2 1% 100mW"
3R10 6R1 6R3 6R5 6R7 6R9 6R11 6R13 6R15 6R17 6R19: library part MCMR04X6191FTL, "9k16 1% 62.5mW"
3R11: library part ERJ2RKF9761X
3R12: library part CRCW040213K0FKED., "13k 1% 62.5mW"
3R13 3R15 3R22 5R6 5R10 5R13 5R17 5R21 5R23: library part CRCW0402100KJNED, "100k 5% 62.5mW"
3R16 3R23 5R3 5R5 5R8 5R11 5R14 5R16 5R19 5R22: library part MP000528, "5k1 1% 100mW"
3R17 4R2: library part ESR01MZPJ102, "1k 5% 200mW"
3R21: library part CRCW040233K0FKEDHP, "33k 1% 200mW"
3U1: "LED Driver Boost"
3U2: "3V3 LDO"
3U3: "Buck Regulator"
3U4: "1V8 LDO"
4C1 4C2 4C8 4C10 4C12 4C13 4C16 4C18 4C19 4C21 4C23 4C25 4C26 4C27 4C28 4C30 4C32 4C34 4C36 4C38 4C40 4C42 4C44 4C46 4C48 4C53 4C56 4C58 4C60 4C62 4C64 4C66 4C68 4C70 4C72 4C74 4C76: library part GCM155R71H103KA55D, "10nF 50V 0402 X7R"
4C3 4C4: library part C0603C100J5GACAUTO, "10pF 50V C0G/NP0"
4JP3: library part PICKitConnector, "2.54mm Header for Pickit 4"
4JP4: "4-Way Net Tie"
4R1: library part R_0402
4U1: "Has 5V Tolerant Pins"
4XTAL1: library part ECS-240-10-36Q-ES-TR, "24MHz 10pF 30ppm"
5D1 5D2 5D3 5D4 5D5 5D6 5D7 5D8 5D9 5D10 5D11 5D12 5D13 5D14 5D15: "Clamping Diode"
5R2: library part AC0402FR-072KL, "2k 1% 62.5mW"
6R2 6R4 6R6 6R8 6R10 6R12 6R14 6R16 6R18 6R20: library part ERJP14F1000U, "100R 1% 500mW"
6U1 6U2 6U3 6U4 6U5 6U6 6U7 6U8 6U9 6U10: library part BC847B,235, "NPN Transistor 50V 100mA 100MHz"
7JP1: "Display Connector for EA W800X-50AILW"
8C1: library part GCJ21BR71A106KE01L, "10uF 10V X7R"
8J1: "SD Card Connector", Manufacturer_Name=Molex, Arrow Part Number=5035000991, Arrow Price/Stock=https://www.arrow.com/en/products/5035000991/molex?region=nac, Datasheet Link=https://www.arrow.com/en/products/5035000991/molex, Height=2.95mm, Manufacturer_Part_Number=5035000991
9C4 9C5 10C4 10C5 11C4 11C5 12C4 12C5: library part GRT1555C1H150JA02D, "15pF 50V C0G/NP0"
9R1 9R2 10R1 10R2 11R1 11R2 12R1 12R2: library part ERJU14F62R0U, "62R 1% 500mW"
9U1 10U1 11U1 12U1: "CAN Trasciever and Controller SPI"
9XTAL1 10XTAL1 11XTAL1 12XTAL1: library part ABM3AIG-20.000MHZ-8-K1Z-T

## Via types
v1: diameter 19.68, hole 7.87, Top Layer to Bottom Layer, 44 vias

## Nets (pads, with @x,y where several pads share a name; then routed paths per layer and width w, separated by ;. In a path a pad name is that pad's centre, name@x,y a point inside that pad or via, vN(x,y) a via of type N, cw(c..) or ccw(c..) an arc to the next point about the centre after c; other vN are vias at no path point)
1V8: 3R20.2 4C11.2 4C12.2 4C15.2 4C16.2 4C23.1 4C24.1 4C26.2 4C51.2 4U1.18 4U1.39 4U1.84 4U1.116
3V3: 3R3.2 3R14.2 4C1.1 4C2.2 4C5.1 4C6.2 4C7.2 4C8.2 4C9.2 4C10.2 4C13.2 4C14.2 4C17.2 4C18.2 4C19.2 4C20.2 4C21.1 4C22.1 4C25.2 4C27.1 4C50.2 4C52.1 4JP3.2 4R3.2 4U1.3 4U1.4 4U1.19 4U1.38 4U1.46 4U1.47 4U1.86 4U1.102 4U1.117 4U1.124 4U1.155 4U1.156 4U1.165 4U1.166 5C1.1 5C2.1 5C3.1 5C4.1 5C5.1 5C6.1 5D1.2 5D2.2 5D3.2 5D4.2 5D5.2 5D6.2 5D7.2 5D8.2 5D9.2 5D10.2 5D11.2 5D12.2 5D13.2 5D14.2 5D15.2 5R6.1 5R10.1 5R13.1 5R17.1 5R21.1 5R23.1 7C1.2 7JP1.4 8C1.2 8C2.1 8J1.4 8R1.2 8R2.2 8R3.2 8R4.2 8R5.2 8R6.2 8R7.2 9C1.2 9C6.2 9U1.1 9U1.19 10C1.2 10C6.2 10U1.1 10U1.19 11C1.2 11C6.2 11U1.1 11U1.19 12C1.2 12C6.2 12U1.1 12U1.19
5V: 3R15.1 3R19.2 3R22.1 3U2.1 3U2.2 3U2.3 3U4.1 3U4.2 3U4.3 9C3.2 9U1.27 10C3.2 10U1.27 11C3.2 11U1.27 12C3.2 12U1.27
B0: 4U1.89 7JP1.21
B1: 4U1.97 7JP1.22
B2: 4U1.146 7JP1.23
B3: 4U1.130 7JP1.24
B4: 4U1.151 7JP1.25
B5: 4U1.92 7JP1.26
B6: 4U1.81 7JP1.27
B7: 4U1.137 7JP1.28
BUTTON_INT: 4JP2.1 4U1.42 5D1.3 5R2.2
C\S\_CAN2: 4U1.7 11U1.17
DE: 4U1.147 7JP1.34
DISP: 4U1.128 7JP1.31
FAULT: 3R3.1 3U1.1 4U1.10
G0: 4U1.143 7JP1.13
G1: 4U1.145 7JP1.14
G2: 4U1.74 7JP1.15
G3: 4U1.75 7JP1.16
G4: 4U1.134 7JP1.17
G5: 4U1.133 7JP1.18
G6: 4U1.132 7JP1.19
G7: 4U1.131 7JP1.20
GND: 3C1.1 3C2.1 3C3.1 3C4.1 3C5.1 3C6.1 3C7.1 3C8.2 3C9.2 3C10.1 3C11.1 3C12.2 3C14.1 3C15.1 3C16.1 3D3.1 3R4.2 3R5.2 3R6.2 3R8.1 3R10.1 3R11.1 3R16.1 3R17.2 3R23.1 3U1.4 3U1.10 3U1.17 3U1.18 3U1.25 3U2.4 3U2.7 3U3.7 3U3.8 3U3.9 3U3.10 3U3.11 3U3.17 3U3.22 3U3.25 3U4.4 3U4.7 4C1.2 4C2.1 4C3.2 4C4.2 4C5.2 4C6.1 4C7.1 4C8.1 4C9.1 4C10.1 4C11.1 4C12.1 4C13.1 4C14.1 4C19.1 4C20.1 4C21.2 4C22.2 4C23.2 4C24.2 4C25.1 4C26.1 4C28.2 4C29.2 4C30.2 4C31.2 4C32.2 4C33.2 4C34.2 4C35.2 4C36.2 4C37.2 4C38.2 4C39.2 4C40.2 4C41.2 4C42.2 4C43.2 4C44.2 4C45.2 4C46.2 4C47.2 4C48.2 4C49.2 4C50.1 4C51.1 4C55.1 4JP3.3 4JP4.1 4U1.5 4U1.6 4U1.37 4U1.83 4U1.87 4U1.94 4U1.103 4U1.115 4U1.122 4U1.123 4U1.153 4U1.154 4XTAL1.3 5D1.1 5D2.1 5D3.1 5D4.1 5D5.1 5D6.1 5D7.1 5D8.1 5D9.1 5D10.1 5D11.1 5D12.1 5D13.1 5D14.1 5D15.1 5R2.1 5R3.1 5R5.1 5R8.1 5R11.1 5R14.1 5R16.1 5R19.1 5R22.1 6R2.2 6R4.2 6R6.2 6R8.2 6R10.2 6R12.2 6R14.2 6R16.2 6R18.2 6R20.2 7C1.1 7JP1.29 8C1.1 8C2.2 8J1.3 8J1.6 8J1.10 8J1.11 8J1.12 8J1.14 8J1.16 8J1.17 8J1.18 9C1.1 9C2.2 9C3.1 9C4.1 9C5.1 9C6.1 9U1.2 9U1.10 9U1.25 9U1.26 10C1.1 10C2.2 10C3.1 10C4.1 10C5.1 10C6.1 10U1.2 10U1.10 10U1.25 10U1.26 11C1.1 11C2.2 11C3.1 11C4.1 11C5.1 11C6.1 11U1.2 11U1.10 11U1.25 11U1.26 12C1.1 12C2.2 12C3.1 12C4.1 12C5.1 12C6.1 12U1.2 12U1.10 12U1.25 12U1.26
  other v1: 13158.35,5123.35 13201.65,5123.35 18898.35,5123.35 18941.65,5123.35 13158.35,5166.65 13201.65,5166.65 18898.35,5166.65 18941.65,5166.65
GND_1V8: 4C53.2 4C54.2 4C56.2 4C57.2 4C58.2 4C59.2 4C60.2 4C61.2 4C62.2 4C63.2 4C64.2 4C65.2 4C66.2 4C67.2 4C68.2 4C69.2 4C70.2 4C71.2 4C72.2 4C73.2 4C74.2 4C75.2 4C76.2 4C77.2 4JP4.2 4U1.177
  other v1: 29181.73,3616.73 29225.04,3616.73 29268.35,3616.73 29311.65,3616.73 29354.96,3616.73 29398.27,3616.73 29181.73,3660.04 29225.04,3660.04 29268.35,3660.04 29311.65,3660.04 29354.96,3660.04 29398.27,3660.04 29181.73,3703.35 29225.04,3703.35 29268.35,3703.35 29311.65,3703.35 29354.96,3703.35 29398.27,3703.35 29181.73,3746.65 29225.04,3746.65 29268.35,3746.65 29311.65,3746.65 29354.96,3746.65 29398.27,3746.65 29181.73,3789.96 29225.04,3789.96 29268.35,3789.96 29311.65,3789.96 29354.96,3789.96 29398.27,3789.96 29181.73,3833.27 29225.04,3833.27 29268.35,3833.27 29311.65,3833.27 29354.96,3833.27 29398.27,3833.27
HSYNC: 4U1.149 7JP1.32
I\N\T\_CAN1: 4U1.119 9U1.13
LED_1: 4U1.69 6R1.1
LED_2: 4U1.71 6R3.1
LED_3: 4U1.79 6R5.1
LED_4: 4U1.82 6R7.1
LED_5: 4U1.93 6R9.1
LED_6: 4U1.121 6R11.1
LED_7: 4U1.126 6R13.1
LED_8: 4U1.129 6R15.1
LED_9: 4U1.138 6R17.1
LED_10: 4U1.139 6R19.1
Net1JP1_1: 3D2.2
Net1JP1_3: 9R2.1 9U1.4
Net1JP1_4: 9R1.2 9U1.3
Net1JP1_5: 10R2.1 10U1.4
Net1JP1_6: 10R1.2 10U1.3
Net1JP1_7: 11R2.1 11U1.4
Net1JP1_8: 11R1.2 11U1.3
Net1JP1_9: 12R2.1 12U1.4
Net1JP1_10: 12R1.2 12U1.3
Net1JP1_12: 4U1.106 5C1.2 5D4.3 5R6.2
Net1JP1_13: 4U1.105 5C2.2 5D6.3 5R10.2
Net1JP1_14: 4U1.101 5C3.2 5D9.3 5R13.2
Net1JP1_15: 4U1.100 5C4.2 5D11.3 5R17.2
Net1JP1_16: 4U1.99 5C5.2 5D13.3 5R21.2
Net1JP1_17: 4U1.98 5C6.2 5D15.3 5R23.2
Net1JP1_18: 5R1.2
Net1JP1_19: 5R4.2
Net1JP1_20: 5R7.2
Net1JP1_21: 5R9.2
Net1JP1_22: 5R12.2
Net1JP1_23: 5R15.2
Net1JP1_24: 5R18.2
Net1JP1_25: 5R20.2
Net1JP1_26: 6U10.3
Net1JP1_27: 6U9.3
Net1JP1_28: 6U8.3
Net1JP1_29: 6U7.3
Net1JP1_30: 6U6.3
Net1JP1_31: 6U5.3
Net1JP1_32: 6U4.3
Net1JP1_33: 6U3.3
Net1JP1_34: 6U2.3
Net1JP1_35: 6U1.3
Net3C3_2: 3C3.2 3C16.2 3D1.1 3JP1.1 3R1.1 3R2.2
Net3C4_2: 3C4.2 3U1.3
Net3C5_2: 3C5.2 3R7.2 3U1.5
Net3C6_2: 3C6.2 3R7.1
Net3C7_2: 3C7.2 3R9.1 3U1.8
Net3C8_1: 3C8.1 3JP2.1 3R14.1 3U2.5
Net3C12_1: 3C12.1 3JP4.1 3R20.1 3U4.5
Net3C13_1: 3C13.1 3U3.15
Net3C13_2: 3C13.2 3L2.1 3U3.12 3U3.13 3U3.14
Net3C14_2: 3C14.2 3C15.2 3JP3.1 3L2.2 3R18.1 3R19.1
Net3D1_2: 3D1.2 3L1.2 3U1.20 3U1.21
Net3R1_2: 3R1.2 7JP1.1
Net3R2_1: 3R2.1 3U1.19
Net3R4_1: 3R4.1 3U1.16
Net3R5_1: 3R5.1 3U1.15
Net3R6_1: 3R6.1 3U1.14
Net3R8_2: 3R8.2 3U1.6
Net3R9_2: 3R9.2 3R11.2 3U1.9
Net3R10_2: 3R10.2 3U1.7
Net3R12_1: 3R12.1 3R16.2 3U3.24
Net3R13_1: 3R13.1 3U3.23
Net3R13_2: 3R13.2 3U3.19
Net3R15_2: 3R15.2 3U2.6
Net3R17_1: 3R17.1 3U3.18
Net3R18_2: 3R18.2 3U3.20 3U3.21
Net3R21_1: 3R21.1 3R23.2 4U1.12
Net3R22_2: 3R22.2 3U4.6
Net3U1_11: 3U1.11 4U1.8
Net3U1_12: 3U1.12 4U1.9
Net3U1_13: 3U1.13 7JP1.2
Net4C3_1: 4C3.1 4R1.2 4XTAL1.1
Net4C4_1: 4C4.1 4U1.163 4XTAL1.2
Net4C15_1: 4C15.1 4C16.1 4C17.1 4C18.1 4U1.21 4U1.22
Net4C27_2: 4C27.2 4C52.2 4U1.48 4U1.49
Net4C53_1: 4C53.1 4C54.1 4U1.66
Net4C55_2: 4C55.2 4R2.1 4R3.1
Net4JP3_1: 4JP3.1 4R2.2 4U1.85
Net4R1_1: 4R1.1 4U1.164
Net4U1_13: 4U1.13 10U1.5
Net4U1_14: 4U1.14 10U1.13
Net4U1_15: 4U1.15 10U1.17
Net4U1_16: 4U1.16 10U1.15
Net4U1_17: 4U1.17 10U1.16
Net4U1_26: 4U1.26 10U1.18
Net4U1_27: 4U1.27 12U1.13
Net4U1_28: 4U1.28 10U1.14
Net4U1_30: 4U1.30 12U1.14
Net4U1_31: 4U1.31 12U1.16
Net4U1_32: 4U1.32 12U1.15
Net4U1_33: 4U1.33 12U1.17
Net4U1_34: 4U1.34 12U1.18
Net4U1_35: 4U1.35 12U1.5
Net4U1_107: 4U1.107 5D14.3 5R20.1 5R22.2
Net4U1_108: 4U1.108 5D12.3 5R18.1 5R19.2
Net4U1_109: 4U1.109 5D10.3 5R15.1 5R16.2
Net4U1_110: 4U1.110 5D8.3 5R12.1 5R14.2
Net4U1_111: 4U1.111 5D7.3 5R9.1 5R11.2
Net4U1_112: 4U1.112 5D5.3 5R7.1 5R8.2
Net4U1_113: 4U1.113 5D3.3 5R4.1 5R5.2
Net4U1_114: 4U1.114 5D2.3 5R1.1 5R3.2
Net4U1_157: 4U1.157 9U1.14
Net4U1_159: 4U1.159 11U1.14
Net4U1_160: 4U1.160 11U1.5
Net4U1_161: 4U1.161 11U1.16
Net4U1_162: 4U1.162 11U1.15
Net4U1_167: 4U1.167 11U1.18
Net4U1_168: 4U1.168 11U1.13
Net4U1_170: 4U1.170 9U1.15
Net4U1_171: 4U1.171 9U1.18
Net4U1_172: 4U1.172 9U1.16
Net4U1_173: 4U1.173 9U1.17
Net4U1_174: 4U1.174 9U1.5
Net6R1_2: 6R1.2 6U1.1
Net6R2_1: 6R2.1 6U1.2
Net6R3_2: 6R3.2 6U2.1
Net6R4_1: 6R4.1 6U2.2
Net6R5_2: 6R5.2 6U3.1
Net6R6_1: 6R6.1 6U3.2
Net6R7_2: 6R7.2 6U4.1
Net6R8_1: 6R8.1 6U4.2
Net6R9_2: 6R9.2 6U5.1
Net6R10_1: 6R10.1 6U5.2
Net6R11_2: 6R11.2 6U6.1
Net6R12_1: 6R12.1 6U6.2
Net6R13_2: 6R13.2 6U7.1
Net6R14_1: 6R14.1 6U7.2
Net6R15_2: 6R15.2 6U8.1
Net6R16_1: 6R16.1 6U8.2
Net6R17_2: 6R17.2 6U9.1
Net6R18_1: 6R18.1 6U9.2
Net6R19_2: 6R19.2 6U10.1
Net6R20_1: 6R20.1 6U10.2
Net9C2_1: 9C2.1 9R1.1 9R2.2
Net9C4_2: 9C4.2 9U1.8 9XTAL1.2
Net9C5_2: 9C5.2 9U1.9 9XTAL1.1
Net9U1_20: 9U1.20 9U1.24
Net9U1_21: 9U1.21 9U1.28
Net10C2_1: 10C2.1 10R1.1 10R2.2
Net10C4_2: 10C4.2 10U1.8 10XTAL1.2
Net10C5_2: 10C5.2 10U1.9 10XTAL1.1
Net10U1_20: 10U1.20 10U1.24
Net10U1_21: 10U1.21 10U1.28
Net11C2_1: 11C2.1 11R1.1 11R2.2
Net11C4_2: 11C4.2 11U1.8 11XTAL1.2
Net11C5_2: 11C5.2 11U1.9 11XTAL1.1
Net11U1_20: 11U1.20 11U1.24
Net11U1_21: 11U1.21 11U1.28
Net12C2_1: 12C2.1 12R1.1 12R2.2
Net12C4_2: 12C4.2 12U1.8 12XTAL1.2
Net12C5_2: 12C5.2 12U1.9 12XTAL1.1
Net12U1_20: 12U1.20 12U1.24
Net12U1_21: 12U1.21 12U1.28
P_CLK: 4JP1.1 4U1.148 7JP1.30
PGEC1_4: 4JP3.5 4U1.11
PGED1_4: 4JP3.4 4U1.169
R0: 4U1.144 7JP1.5
R1: 4U1.127 7JP1.6
R2: 4U1.76 7JP1.7
R3: 4U1.96 7JP1.8
R4: 4U1.95 7JP1.9
R5: 4U1.90 7JP1.10
R6: 4U1.91 7JP1.11
R7: 4U1.80 7JP1.12
SDCD: 4U1.53 8J1.15 8R4.1
SDCK: 4U1.54 8J1.5
SDCMD: 4U1.70 8J1.2 8R2.1
SDDATA0: 4U1.64 8J1.7 8R5.1
SDDATA1: 4U1.56 8J1.8 8R6.1
SDDATA2: 4U1.65 8J1.9 8R7.1
SDDATA3: 4U1.55 8J1.1 8R1.1
SDWP: 4U1.141 8J1.13 8R3.1
VBAT: 3C1.2 3C2.2 3C9.1 3C10.2 3C11.2 3D2.1 3D3.2 3L1.1 3R12.2 3R21.2 3U1.24 3U3.1 3U3.2 3U3.3 3U3.4 3U3.5 3U3.6
VDDR_PIN57_4: 4C28.1 4C29.1 4C56.1 4C57.1 4U1.57
VDDR_PIN58_4: 4C30.1 4C31.1 4C58.1 4C59.1 4U1.58
VDDR_PIN59_4: 4C32.1 4C33.1 4C60.1 4C61.1 4U1.59
VDDR_PIN60_4: 4C34.1 4C35.1 4C62.1 4C63.1 4U1.60
VDDR_PIN61_4: 4C36.1 4C37.1 4C64.1 4C65.1 4U1.61
VDDR_PIN62_4: 4C38.1 4C39.1 4C66.1 4C67.1 4U1.62
VDDR_PIN63_4: 4C40.1 4C41.1 4C68.1 4C69.1 4U1.63
VDDR_PIN67_4: 4C42.1 4C43.1 4C70.1 4C71.1 4U1.67
VDDR_PIN68_4: 4C44.1 4C45.1 4C72.1 4C73.1 4U1.68
VDDR_PIN72_4: 4C46.1 4C47.1 4C74.1 4C75.1 4U1.72
VDDR_PIN78_4: 4C48.1 4C49.1 4C76.1 4C77.1 4U1.78
VSYNC: 4U1.150 7JP1.33
pads on no net: 3U1.2 3U1.22 3U1.23 3U3.16 4JP3.6 4JP3.7 4JP3.8 4JP3.9 4JP3.10 4JP3.11 4JP3.12 4JP4.3 4JP4.4 4U1.1 4U1.2 4U1.20 4U1.23 4U1.24 4U1.25 4U1.29 4U1.36 4U1.40 4U1.41 4U1.43 4U1.44 4U1.45 4U1.50 4U1.51 4U1.52 4U1.73 4U1.77 4U1.88 4U1.104 4U1.118 4U1.120 4U1.125 4U1.135 4U1.136 4U1.140 4U1.142 4U1.152 4U1.158 4U1.175 4U1.176 7JP1.3 7JP1.35 7JP1.36 7JP1.37 7JP1.38 7JP1.39 7JP1.40 7JP1.41 9U1.6 9U1.7 9U1.11 9U1.12 9U1.22 9U1.23 10U1.6 10U1.7 10U1.11 10U1.12 10U1.22 10U1.23 11U1.6 11U1.7 11U1.11 11U1.12 11U1.22 11U1.23 12U1.6 12U1.7 12U1.11 12U1.12 12U1.22 12U1.23

## Text inside footprints (layer, text, board x,y; h text height)
3JP1: Top Overlay "=TestpointName" at 19140.64,4447.2 h60 r90
3JP2: Top Overlay "=TestpointName" at 14195.64,4447.2 h60 r90
3JP3: Top Overlay "=TestpointName" at 11235.64,4447.2 h60 r90
3JP4: Top Overlay "=TestpointName" at 8075.64,4447.2 h60 r90
4JP1: Top Overlay "=TestpointName" at 27660.64,3382.2 h60 r90
4JP2: Top Overlay "=TestpointName" at 24580.64,3382.2 h60 r90